# Altium PCB TX_fsi6.PcbDoc
Units mil, origin at the board's own origin, x right, y up, seen from the top; angles counter-clockwise.
Board outline 4470.66 x 2569.09 mil, 2 copper layers (Top Layer, Bottom Layer); 127 components, 96 nets, 409 pads, 170 vias.
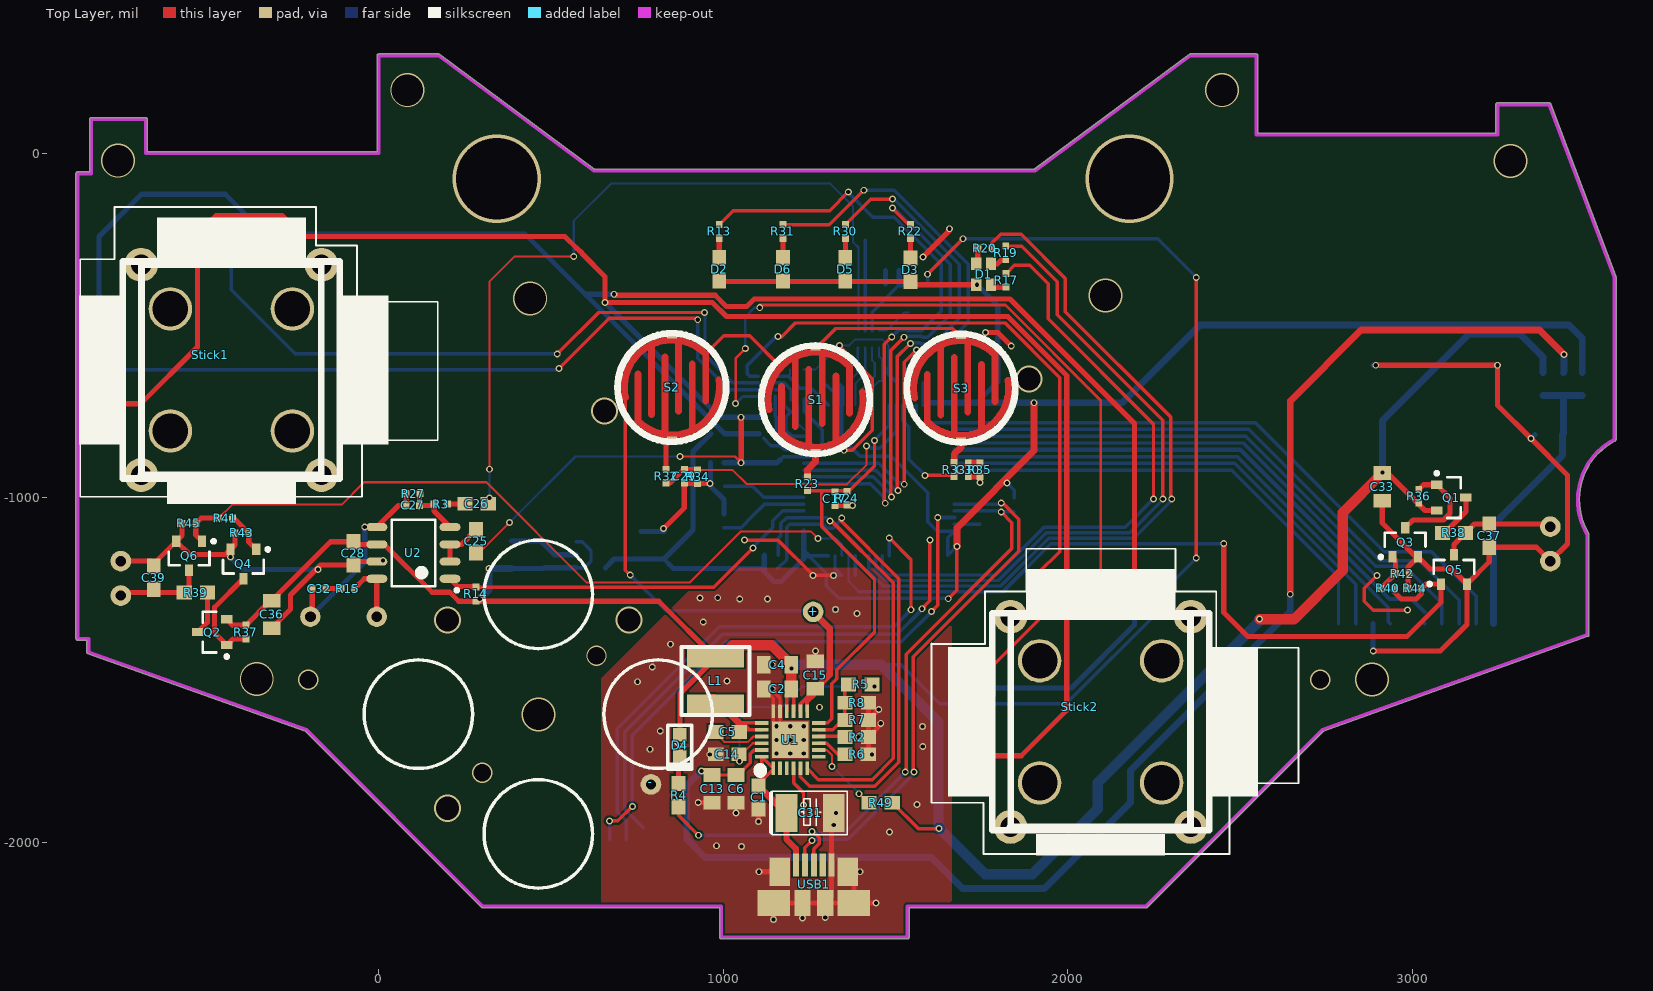
[diagram p0: Top Layer view]
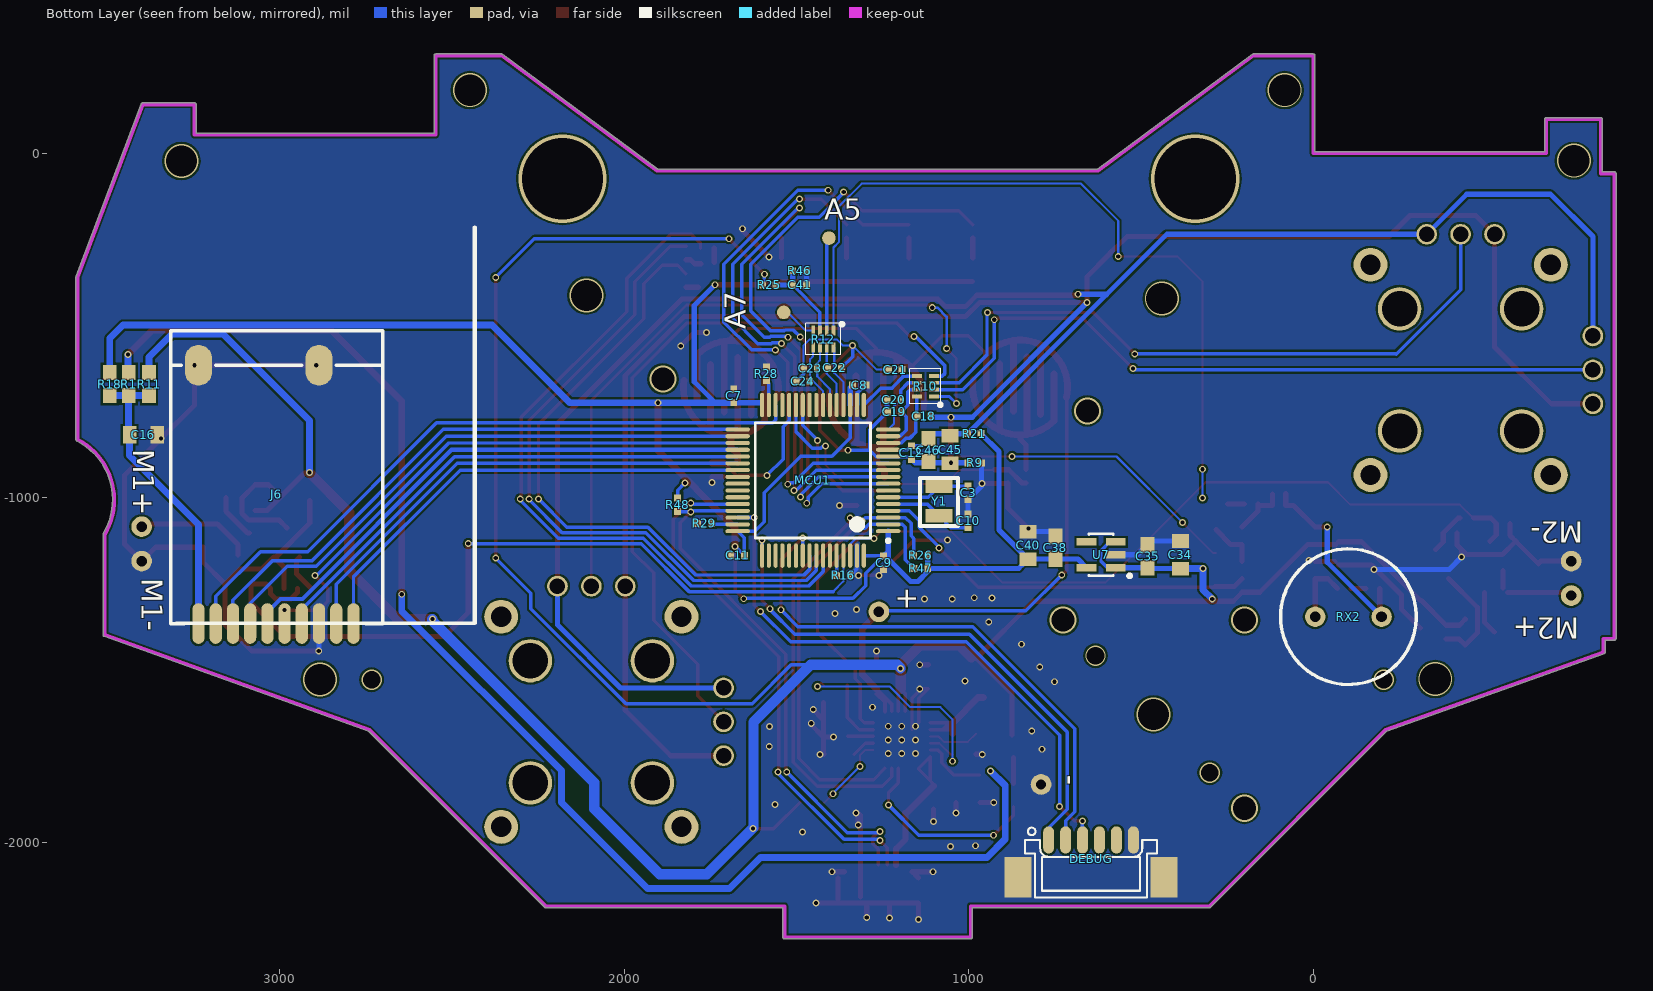
[diagram p1: Bottom Layer view, seen from below]

## Layer stack, top to bottom
Top Solder: solder mask 0.4, Solder Resist, Dk 3.5
Top Layer: signal copper 1.4
Dielectric1: dielectric 12.6, FR-4, Dk 4.8
Bottom Layer: signal copper 1.4
Bottom Solder: solder mask 0.4, Solder Resist, Dk 3.5

## Board outline
989.87,-2275.59 ccw(c994.88,-2275.59) 994.88,-2280.61 1534.25,-2280.61 ccw(c1534.25,-2275.59) 1539.27,-2275.59 1539.27,-2190.06 2227.17,-2190.06 ccw(c2227.17,-2185.04) 2230.73,-2188.57 2230.71,-2188.59 2741.73,-1677.57 3509.56,-1402.36 ccw(c3507.88,-1397.64) 3512.89,-1397.64 3512.89,-1106.3 ccw(c3507.88,-1106.3) 3512.18,-1103.73 cw(c3677.01,-1005.58) 3588.89,-835.18 ccw(c3586.62,-830.71) 3591.63,-830.71 3591.63,-358.27 ccw(c3586.62,-358.27) 3591.3,-356.48 3591.31,-356.49 3591.3,-356.48 3402.34,143.49 3402.33,143.51 3402.34,143.49 ccw(c3397.64,141.73) 3397.64,146.75 3248.03,146.75 ccw(c3248.03,141.73) 3243.02,141.73 3243.02,58.95 2552.26,58.95 2552.26,283.46 ccw(c2547.25,283.46) 2547.25,288.48 2355.91,288.48 ccw(c2355.91,283.46) 2352.91,287.49 2352.92,287.49 2352.91,287.49 1902.68,-46.17 626.46,-46.17 176.22,287.49 176.21,287.49 176.22,287.49 ccw(c173.23,283.46) 173.23,288.48 0,288.48 ccw(c0,283.46) -5.02,283.46 -5.02,5.01 -672.15,5.01 -672.15,98.82 ccw(c-677.17,98.82) -677.17,103.83 -834.65,103.83 ccw(c-834.65,98.82) -839.66,98.82 -839.66,-53.65 -874.02,-53.65 ccw(c-874.02,-58.66) -879.03,-58.66 -879.03,-1408.27 ccw(c-874.02,-1408.27) -874.02,-1413.28 -847.54,-1413.28 -847.54,-1447.64 ccw(c-842.52,-1447.64) -844.2,-1452.36 -844.21,-1452.36 ccw(c-842.52,-1447.64) -844.2,-1452.36 -212.59,-1677.57 298.42,-2188.59 298.41,-2188.57 ccw(c301.97,-2185.04) 301.97,-2190.06 989.87,-2190.06

## Design rules (kind name [scope] priority, off if disabled: settings)
Clearance [All] p1: gap=6
HoleSize [All] p1: absolutevalues=TRUE maxlimit=150 minlimit=1 maxpercent=80.000 minpercent=20.000
MinimumSolderMaskSliver [All] p1 off: minsoldermaskwidth=10
PlaneConnect [All] p1: planeconnectstyle=Direct reliefexpansion=20 reliefentries=4 reliefconductorwidth=10 reliefairgap=10
PolygonConnect [All] p1: connectstyle=Direct reliefconductorwidth=10 reliefentries=4 polygonreliefangle="90 Angle" airgapwidth=10
RoomDefinition BQ24295 [InComponentClass('BQ24295')] p1 off: confinementstyle=ConfineIn formatcopy=TRUE lockcomponents=FALSE outline -1914.72,-3250.59 -606.19,-3250.59 -606.19,-1710.67 -1914.72,-1710.67
RoomDefinition TX_fsi6 [InComponentClass('TX_fsi6')] p2 off: confinementstyle=ConfineIn formatcopy=TRUE lockcomponents=FALSE outline -10235.72,-1425.67 -11720.72,-1425.67 -11720.72,-2570.67 -10235.72,-2570.67
RoutingVias [All] p1: holewidth=28 width=50 viastyle="Through Hole" minholewidth=12 minwidth=20 maxholewidth=28 maxwidth=50
SilkToSilkClearance [All] p1 off: silktosilkclearance=10
SilkToSolderMaskClearance [IsPad] p1 off: minsilkscreentomaskgap=10 clearancetoexposedcopper=TRUE
SolderMaskExpansion [All] p1: expansion=4
UnpouredPolygon [All] p1: allowunpoured=FALSE
Width [All] p1: maxlimit=80 minlimit=6 preferedwidth=10
24 further rules are at their usual default settings.

## Classes and differential pairs
component class TX_fsi6: A5 A7 C3 C7 C8 C9 C10 C11 C12 C16 C17 C18 C19 C20 C21 C22 C23 C24 C25 C26 C27 C28 C29 C30 C32 C33 C34 C35 C36 C37 C38 C39 C40 C41 C45 C46 D1 D2 D3 D5 D6 DEBUG J5 J6 M1+ M1- M2+ M2- MCU1 Q1 Q2 Q3 Q4 Q5 Q6 R1 R3 R9 R10 R11 R12 R13 R14 R15 R16 R17 R18 R19 R20 R21 R22 R23 R24 R25 R26 R27 R28 R29 R30 R31 R32 R33 R34 R35 R36 R37 R38 R39 R40 R41 R42 R43 R44 R45 R46 R47 R48 RX2 S1 S2 S3 Stick1 Stick2 U2 U7 Y1
component class BQ24295: + - C1 C2 C4 C5 C6 C13 C14 C15 C31 D4 L1 R2 R4 R5 R6 R7 R8 R49 U1 USB1

## Components (designator, comment, footprint, x,y, rotation, side; value= is the part's Value field where it differs from the comment)
+ "TP_5" TestPad 1261,-1331 r90 top
- "TP_5" TestPad 790,-1832 r90 top
A5 "" "TestPad - 1mm" 1405.88,-245.96 r180 bottom
A7 "" "TestPad - 1mm" 1536.98,-461.66 r180 bottom
C1 "1uF" 0603 1102.31,-1869.57 r270 top
C2 "22uF" 0805 1157.31,-1554.57 r180 top
C3 "22pF" 0402 1001.84,-984.99 r270 bottom
C4 "22uF" 0805 1157.31,-1484.57 r180 top
C5 "47nF" 0603 1012.31,-1679.57 r0 top
C6 "22uF" 0805 1037.31,-1844.57 r270 top
C7 "1n" 0402 1682.31,-704.09 r270 bottom
C8 "1n" 0402 1317.79,-672.99 r0 bottom
C9 "1n" 0402 1247.31,-1189.09 r90 bottom
C10 "22pF" 0402 1001.84,-1066.69 r90 bottom
C11 "0.1u*4" 0402 1671.13,-1167.08 r180 bottom
C12 "0.1u" 0402 1166.21,-868.85 r90 bottom
C13 "22uF" 0805 967.31,-1844.57 r270 top
C14 "4.7uF" 0603 1012.31,-1744.57 r180 top
C15 "22uF" 0805 1267.31,-1514.57 r90 top
C16 "C" 0805 3395.98,-816.66 r180 bottom
C17 "0.1uF" 0402 1324,-1002 r270 top
C18 "0.1u*4" 0402 1130.78,-762.55 r180 bottom
C19 "1n" 0402 1215.42,-750.74 r0 bottom
C20 "1n" 0402 1217.39,-715.31 r0 bottom
C21 "1n" 0402 1213,-628 r0 bottom
C22 "1n" 0402 1389.64,-622.79 r180 bottom
C23 "1n" 0402 1459.52,-623.77 r0 bottom
C24 "1n" 0402 1481.17,-662.16 r0 bottom
C25 "1uF" 0603 282.59,-1125.59 r270 top
C26 "1uF" 0603 283.57,-1017.32 r0 top
C27 "4.7nF/NC" 0402 98.53,-1022.24 r0 top
C28 "1uF" 0603 -73.71,-1161.02 r270 top
C29 "0.1uF" 0402 886.92,-937.6 r270 top
C30 "0.1uF" 0402 1711.05,-917.82 r270 top
C31 "100uF" 1210 1252,-1914.57 r0 top
C32 "2.2nF" 0402 -173.23,-1263.39 r180 top
C33 "C" 0805 2912.79,-967.91 r270 top
C34 "C" 0805 385.65,-1165.39 r90 bottom
C35 "C" 0603 480.65,-1170.39 r90 bottom
C36 "C" 0805 -311.02,-1338.19 r270 top
C37 "0.1uF" 0603 3223.82,-1109.65 r270 top
C38 "C" 0603 748.13,-1144.84 r90 bottom
C39 "0.1uF" 0603 -653.54,-1231.89 r90 top
C40 "C" 0805 827.85,-1137.95 r90 bottom
C41 "0.1uF" 0402 1490.98,-381.66 r0 bottom
C45 "C" 0805 1054.01,-859.99 r270 bottom
C46 "C" 0603 1117,-860.98 r270 bottom
D1 "LEDx3" LC-0603_Rx2 1756.01,-350.98 r0 top
D2 "LED0" 0603 988.3,-337.2 r90 top
D3 "LED0" 0603 1543.41,-338.19 r90 top
D4 "LED" LED0603 874.04,-1718.7 r270 top
D5 "LED0" 0603 1354.44,-337.2 r90 top
D6 "LED0" 0603 1173.34,-337.2 r90 top
DEBUG "J12" CON1_25-6P-SMD 646,-2087 r180 bottom
J6 "CON12" RF_AS01_SPIPX 3061,-1365 r90 bottom
L1 "2.2uH" L50xx 977.39,-1531.69 r90 top
M1+ "" TestPad 3400.98,-1083.66 r90 bottom
M1- "" TestPad 3400.98,-1183.66 r180 bottom
M2+ "" TestPad -749.02,-1283.66 r270 bottom
M2- "" TestPad -749.02,-1183.66 r270 bottom
MCU1 "STM32F103R8T6" LQFP64_N 1452.31,-949.09 r0 bottom
Q1 "PMOS" SOT-23B_L 3113.58,-999.41 r0 top
Q2 "PMOS" SOT-23B_L -483.75,-1389.93 r180 top
Q3 "NPN" SOT-23B_L 2979.72,-1129.33 r90 top
Q4 "NPN" SOT-23B_L -393.14,-1192.02 r270 top
Q5 "NMOS" SOT-23B_L 3121.46,-1208.07 r90 top
Q6 "NMOS" SOT-23B_L -550.62,-1168.4 r270 top
R1 "NC" 0603 3438.65,-669.95 r90 bottom
R2 "317R" 0603 1387.31,-1694.57 r0 top
R3 "10k" 0402 180.23,-1018.31 r180 top
R4 "1k" 0603 870.11,-1863.38 r90 top
R5 "317R" 0603 1397.98,-1541.66 r180 top
R6 "10k" 0603 1387.31,-1744.57 r180 top
R7 "317R" 0603 1387.31,-1644.57 r0 top
R8 "317R" 0603 1387.31,-1594.57 r0 top
R9 "0R" 0402 983.14,-898.38 r180 bottom
R10 "200R" 0402X4 1125.86,-675.94 r0 bottom
R11 "NC" 0603 3379.59,-669.95 r90 bottom
R12 "200R" 0402X4 1422.12,-539.13 r270 bottom
R13 "1K" 0402 988.3,-226.97 r90 top
R14 "10k" 0402 282,-1279 r270 top
R15 "20R" 0402 -90.55,-1263.39 r0 top
R16 "10k" 0402 1363.73,-1225 r0 bottom
R17 "1k" 0402 1820.97,-368.7 r270 top
R18 "NC" 0603 3493.77,-669.95 r90 bottom
R19 "1k" 0402 1819.99,-288.98 r270 top
R20 "1k" 0402 1758.97,-275.2 r180 top
R21 "FB" 0402 984.12,-813.73 r180 bottom
R22 "1k" 0402 1543.41,-226.97 r90 top
R23 "1k" 0402 1244.2,-959.25 r90 top
R24 "10k" 0402 1359,-1001 r90 top
R25 "4.7k" 0402 1578.98,-381.66 r0 bottom
R26 "4.7k" 0402 1139.98,-1166.66 r180 bottom
R27 "10k" 0402 99.52,-987.79 r180 top
R28 "0R" 0402 1587.47,-639.52 r270 bottom
R29 "FB" 0402 1767.31,-1074.09 r180 bottom
R30 "1k" 0402 1354.44,-226.97 r90 top
R31 "1k" 0402 1173.34,-226.97 r90 top
R32 "1k" 0402 833.77,-937.6 r90 top
R33 "1k" 0402 1670.38,-917.91 r90 top
R34 "10k" 0402 925.3,-938.58 r90 top
R35 "10k" 0402 1745.19,-918.9 r90 top
R36 "1k" 0402 3019.09,-995.47 r90 top
R37 "1k" 0402 -385.83,-1389.37 r270 top
R38 "5R" 0603 3121.46,-1101.77 r180 top
R39 "5R" 0603 -531.5,-1275.2 r0 top
R40 "10k" 0402 2928.54,-1263.19 r0 top
R41 "10k" 0402 -444.88,-1058.66 r180 top
R42 "10k" 0402 2971.85,-1219.88 r180 top
R43 "10k" 0402 -397.64,-1101.97 r0 top
R44 "10k" 0402 3007.28,-1263.19 r0 top
R45 "10k" 0402 -551.18,-1074.41 r0 top
R46 "4.7k" 0402 1490.98,-340.66 r0 bottom
R47 "4.7k" 0402 1138.98,-1204.66 r180 bottom
R48 "NC/1.5k" 0402 1845,-1020 r90 bottom
R49 "10k" 0603 1457,-1885 r180 top
RX2 "NC" sonar-10mm -102.25,-1345.08 r180 bottom
S1 "button" RubberButton-8mm#1 1267.82,-715.16 r90 top
S2 "button" RubberButton-8mm#1 850.77,-679.68 r90 top
S3 "button" RubberButton-8mm#2 1690.32,-681.59 r90 top
Stick1 "stick" stick -428.04,-628.54 r90 top
Stick2 "stick" stick 2095.58,-1650.2 r90 top
U1 "BQ24295" BQ24295 1194.31,-1702.57 r90 top
U2 "LM4871 / FM8002" SOIC8_39MM 100.5,-1160.04 r180 top
U7 "RT9193-33_1_2" SOT23-5 655.65,-1190.39 r90 bottom
USB1 "USB Micro Type B" MOLEX-47346-0001 1263.02,-2176.53 r90 top
Y1 "XTAL" "OSCILLATOR-3.2X2.5 - 2P" 1086,-1012 r270 bottom

## Footprints (in the part's own frame and the unit in brackets; to place one, negate y for a bottom-side part, rotate by r counter-clockwise, add the part's x,y. Pads: shape width x height; smd on the part's side, far side on the other; paste and mask are expansions set on the pad)
0402 [mil] "0402-RES"
  rect 20x20 smd: 1(-19.69,0) 2(20,0)
0402X4 [mm]
  rect 0.75x0.28 smd: 1(-0.625,0.75) 2(-0.625,0.25) 3(-0.625,-0.25) 4(-0.625,-0.75) 5(0.625,-0.75) 6(0.625,-0.25) 7(0.625,0.25) 8(0.625,0.75)
  silkscreen extent -1.22,-1.3 1.15,1.5
0603 [mil] "0603-RES"
  rect 44x40 smd: 1(-33.46,0) 2(34,0)
0805 [mil]
  rect 39.37x50 smd: 1(-40,0) 2(40,0)
  body extent -50,-30 50,30, height 31
1210 [mil] "1210"
  rect 63x110 smd: 1(-68.7,0) 2(68.7,0)
  silkscreen extent -116,-63 108,63
BQ24295 [mm]
  rect 2.7x2.7 smd: 0(0,0)
  rect 1x0.28 smd: 1(-2.1,1.25) 2(-2.1,0.75) 3(-2.1,0.25) 4(-2.1,-0.25) 5(-2.1,-0.75) 6(-2.1,-1.25) 13(2.1,-1.25) 14(2.1,-0.75) 15(2.1,-0.25) 16(2.1,0.25) 17(2.1,0.75) 18(2.1,1.25)
  rect 0.28x1 smd: 7(-1.25,-2.1) 8(-0.75,-2.1) 9(-0.25,-2.1) 10(0.25,-2.1) 11(0.75,-2.1) 12(1.25,-2.1) 19(1.25,2.1) 20(0.75,2.1) 21(0.25,2.1) 22(-0.25,2.1) 23(-0.75,2.1) 24(-1.25,2.1)
  silkscreen extent -2.3,2.2 -2.2,2.2, body extent -2,-2 2,2, height 0.9
CON1_25-6P-SMD [mil]
  oval 31.5x78.7 smd: 1(-122,94) 2(-72.8,94) 3(-23.6,94) 4(25.6,94) 5(74.8,94) 6(124.1,94)
  rect 78.7x118.1 smd: 7(-210.6,-14.3) 8(212.6,-14.3)
  silkscreen extent -191,-73 193,130
L50xx [mm]
  rect 1.4x4.2 smd: 1(1.7,0) 2(-1.7,0)
  silkscreen extent -2.5,-2.5 2.5,2.5
LC-0603_Rx2 [mm]
  rect 0.75x0.93 smd: 1(-0.55,-0.77) 2(0.55,-0.77) 3(0.55,0.77) 4(-0.55,0.77)
LED0603 [mm] "LED0603"
  rect 1x1 smd: 1(-0.787,0) 2(0.787,0)
  silkscreen extent -1.5,-0.89 1.78,0.89
LQFP64_N [mm]
  oval 1.8x0.3 smd: 1(-5.55,3.75) 2(-5.55,3.25) 3(-5.55,2.75) 4(-5.55,2.25) 5(-5.55,1.75) 6(-5.55,1.25) 7(-5.55,0.75) 8(-5.55,0.25) 9(-5.55,-0.25) 10(-5.55,-0.75) 11(-5.55,-1.25) 12(-5.55,-1.75) 13(-5.55,-2.25) 14(-5.55,-2.75) 15(-5.55,-3.25) 16(-5.55,-3.75) 33(5.55,-3.75) 34(5.55,-3.25) 35(5.55,-2.75) 36(5.55,-2.25) 37(5.55,-1.75) 38(5.55,-1.25) 39(5.55,-0.75) 40(5.55,-0.25) 41(5.55,0.25) 42(5.55,0.75) 43(5.55,1.25) 44(5.55,1.75) 45(5.55,2.25) 46(5.55,2.75) 47(5.55,3.25) 48(5.55,3.75)
  oval 0.3x1.8 smd: 17(-3.75,-5.55) 18(-3.25,-5.55) 19(-2.75,-5.55) 20(-2.25,-5.55) 21(-1.75,-5.55) 22(-1.25,-5.55) 23(-0.75,-5.55) 24(-0.25,-5.55) 25(0.25,-5.55) 26(0.75,-5.55) 27(1.25,-5.55) 28(1.75,-5.55) 29(2.25,-5.55) 30(2.75,-5.55) 31(3.25,-5.55) 32(3.75,-5.55) 49(3.75,5.55) 50(3.25,5.55) 51(2.75,5.55) 52(2.25,5.55) 53(1.75,5.55) 54(1.25,5.55) 55(0.75,5.55) 56(0.25,5.55) 57(-0.25,5.55) 58(-0.75,5.55) 59(-1.25,5.55) 60(-1.75,5.55) 61(-2.25,5.55) 62(-2.75,5.55) 63(-3.25,5.55) 64(-3.75,5.55)
  silkscreen extent -5.67,-4.25 4.25,4.57
MOLEX-47346-0001 [mil] "MOLEX-47346-0001"
  rect 67x18 smd: 1(111,52) 2(111,26) 3(111,0) 4(111,-25.59) 5(111,-51.18)
  rect 75x94 smd: 5(0,117) 5(0,-116.14)
  rect 75x47 smd: 5(0,33) 5(0,-32.97)
  rect 83x59 smd: 5(91,-98.43) 5(91,99)
"OSCILLATOR-3.2X2.5 - 2P" [mm] "OSCILLATOR-3.2X2.5"
  rect 1x2 smd: 1(-1.143,0) 2(1.016,0)
  silkscreen extent -1.78,-1.4 1.78,1.4
RF_AS01_SPIPX [mm]
  oval 3x0.9 smd: 1(0,4.445) 2(0,3.175) 3(0,1.905) 4(0,0.635) 5(0,-0.635) 6(0,-1.905) 7(0,-3.175) 8(0,-4.445) 9(0,-5.715) 10(0,-6.985)
  oval 3x2 smd: 11(19.05,4.445) 12(19.05,-4.445)
  silkscreen extent 0,-9.14 21.59,6.5
RubberButton-8mm#1 [mm]
  rect 0.25x0.75 smd: 1(-3.75,0) 2(3.75,0)
  Top Layer lines w0.5: -0.733,3.422 cw(c0,0) 2.475,-2.475 ; -2.475,2.5 1,2.5 ; -2.475,2.475 ccw(c0,0) 0.575,-3.452 ; -2,1.5 3,1.5 ; -3.25,0.5 2.25,0.5 ; -1.75,-0.5 3.25,-0.5 ; -3,-1.5 1.75,-1.5 ; -1,-2.5 2.475,-2.5
  silkscreen extent -4,-4 4,4
RubberButton-8mm#2 [mm]
  rect 0.25x0.75 smd: 1(-3.75,0) 2(3.75,0)
  Top Layer lines w0.5: -0.733,3.422 cw(c0,0) 2.068,2.823 cw(c0,0) 2.475,-2.475 ; -2.475,2.5 1,2.5 ; -2.475,2.475 ccw(c0,0) 0.575,-3.452 ; -2,1.5 3,1.5 ; -3.25,0.5 2.25,0.5 ; -1.75,-0.5 3.25,-0.5 ; -3,-1.5 1.75,-1.5 ; -1,-2.5 2.475,-2.5
  silkscreen extent -4,-4 4,4
SOIC8_39MM [mm]
  oval 1.55x0.6 smd: 1(-2.7,1.905) 2(-2.7,0.635) 3(-2.7,-0.635) 4(-2.7,-1.905) 5(2.7,-1.905) 6(2.7,-0.635) 7(2.7,0.635) 8(2.7,1.905)
  silkscreen extent -3.33,-2.45 1.6,2.87
sonar-10mm [mm]
  round 1.5 hole 0.8: 1(-2.45,0) 2(2.45,0)
  silkscreen extent -5,-5 5,5
SOT23-5 [mm]
  rect 0.55x1.45 smd: 1(-0.315,-2.091) 2(0.635,-2.091) 3(1.585,-2.091) 4(1.585,0.059) 5(-0.315,0.059)
  silkscreen extent -1.04,-3.24 2.19,-0.12
SOT-23B_L [mm] "SOT23, 3-Leads, Body 2.9x1.3mm, Pitch 0.95mm, Lead Span 2.4mm, IPC High Density"
  rect 0.85x0.6 smd: 1(-1.075,0.95) 2(-1.075,-0.95) 3(1.075,0)
  silkscreen extent -1.2,-1.5 0.7,1.92, body extent -0.7,-1.5 0.7,1.5, height 1.14
stick [mm]
  round 2.5 hole 1.5: 0(-7.75,-6.65) 0(-7.75,6.65) 0(7.75,-6.65) 0(7.75,6.65)
  round 3.2 hole 2.6: 0(-4.5,-4.5) 0(-4.5,4.5) 0(4.5,-4.5) 0(4.5,4.5)
  round 1.524 hole 1.143: 1(10,-2.5) 2(10,0) 3(10,2.5) 4(2.5,9.75) 5(0,9.75) 6(-2.5,9.75)
  silkscreen extent -9.87,-11.6 11.25,11.25
TestPad [mil]
  round 60 hole 30: 1(0,0)
"TestPad - 1mm" [mm]
  round 1 smd: 1(0,0)

## Part data
A5 A7 M1+ M1- M2+ M2-: library part TP_5
C1 C2 C4 C5 C6 C13 C14 C15: library part C
C3 C7 C8 C9 C10 C11 C12 C18 C19 C20 C21 C22 C23 C24 C25 C26 C27 C28 C32 C37 C39 C41: library part CAP0402-CAP, "<b>Capacitor</b> / Standard 0603 ceramic capacitor, and 0.1\" leaded capacitor."
C17 C29 C30: library part Cap, "Capacitor"
C31: library part "Cap Pol1", "Polarized Capacitor (Radial)"
D1: "Typical RED GaAs LED"
D2 D3 D5 D6: "Typical INFRARED GaAs LED"
J6: "Connector"
L1: library part INDUCTOR
MCU1: "STM32 ARM-based 32-bit MCU with 64 Kbytes Flash, 64-pin LQFP, Industrial Temperature"
Q3 Q4: "NPN Bipolar Transistor"
R1 R11 R18: library part Res
R2 R4 R5 R6 R7 R8 R49: library part R
R3 R9 R13 R14 R15 R16 R17 R19 R20 R21 R22 R23 R24 R25 R26 R27 R28 R29 R30 R31 R32 R33 R34 R35 R36 R37 R38 R39 R40 R41 R42 R43 R44 R45 R46 R47 R48: library part Res2, "Resistor"
R10 R12: library part Res*4, "Resistor"
RX2: library part sonar
U2: library part LM4871
USB1: library part USB_Micro_TypeB, "Connector SMD USB Micro Type B middle mount"
Y1: "Crystal Oscillator"

## Via types
v1: diameter 20, hole 12, Top Layer to Bottom Layer, 141 vias
v2: diameter 98.43, hole 90.55, Top Layer to Bottom Layer, 9 vias
v3: diameter 20/20 (per signal layer), hole 12, Top Layer to Bottom Layer, 9 vias
v4: diameter 78.74, hole 66.93, Top Layer to Bottom Layer, 5 vias
v5: diameter 59.06, hole 51.18, Top Layer to Bottom Layer, 4 vias
v6: diameter 255.91, hole 236.22, Top Layer to Bottom Layer, 2 vias

## Nets (pads, with @x,y where several pads share a name; then routed paths per layer and width w, separated by ;. In a path a pad name is that pad's centre, name@x,y a point inside that pad or via, vN(x,y) a via of type N, cw(c..) or ccw(c..) an arc to the next point about the centre after c; other vN are vias at no path point)
ADC1: R10.1 Stick2.2 | length 2033.6
  Top Layer w8: v1(1036,-726) 1036,-595 v1(1064,-567) ; v1@1106,-440 1819,-440 2095.58,-716.58 Stick2.2
  Bottom Layer w8: v1(1036,-726) 1056.53,-705.47 R10.1 ; v1(1064,-567) 1064,-475 1091,-448 v1(1106,-448)
ADC2: R10.2 Stick1.5 | length 2127.2
  Top Layer w10: v1(523,-625) 669,-479 926,-479 v1(926,-483)
  Bottom Layer w10: Stick1.5 v1@523,-628.54 ; v1(926,-483) 926,-595 1016.78,-685.78 R10.2
ADC3: R10.3 Stick1.2 | length 1974
  Top Layer w10: v1(518,-582) 638,-462 v1(946,-462)
  Bottom Layer w10: Stick1.2 -428.04,-395.96 -241,-583 -240,-582 v1(518,-582) ; v1(946,-462) 947,-463 947,-585 1028.1,-666.1 R10.3
ADC4: R10.4 Stick2.5 | length 2192.1
  Top Layer w10: v1(1159,-532) 1169.82,-532 1209.32,-492.5 1818.34,-492.5 1977,-651.16 1977,-1156 1915,-1218 1915,-1355 1787,-1483 1787,-1574.92 Stick2.5
  Bottom Layer w10: R10.4 1076.41,-646.41 1069,-639 1069,-616 1153,-532 v1(1159,-532)
ADC5: A5.1 R12.2 | length 262.2
  Bottom Layer w10: R12.2 A5.1@1412.27,-252.35
ADC6: C41.2 R12.3 R25.1 R46.2 | length 252.6
  Bottom Layer w10: R12.3 1431.96,-460.69 C41.2
  Bottom Layer w15: C41.2 R25.1 ; C41.2@1510.98,-379.36 R46.2
ADC7: A7.1 R12.4 | length 107.2
  Bottom Layer w6: R12.4 1473.12,-514.52 1525.98,-461.66 A7.1
AGND: C12.1 C18.2 C19.2 C20.2 C21.2 C22.2 C23.2 C24.2 C25.2 C45.2 C46.2 MCU1.12 R9.1 Stick1.3 Stick1.6 Stick2.3 Stick2.6 | length 7801.3
  Top Layer w6: C25.2 291.41,-1159.59 v1(379,-1072) ; v1(874,-880) 1034.01,-880 v1(1052,-897.99)
  Top Layer w10: v1(1337,-558) 1433,-654 1433,-804 1408.31,-828.69 1407.3,-828.69 1395,-840.99 1395,-842 1375,-862 v1(1350,-862)
  Top Layer w15: Stick1.6 -691.32,-726.97 -526.47,-562.11 Stick1.3 -471.63,-180 -281,-180 -220,-241 540,-241 574.5,-275.5 575.73,-275.5 589.5,-289.27 589.5,-290.5 657,-358 v1(657,-433) 968,-433 1009,-474 1826,-474 1997.15,-645.15 Stick2.3 1997.15,-1616.49 1865.02,-1748.62 Stick2.6 ; v1(1052,-897.99) v1(1052,-766)
  Bottom Layer w6: v1(379,-1072) 571,-880 v1(874,-880) ; C21.2 1267,-628 v1(1337,-558) 1337.48,-557.52 1365.8,-557.52 1383.35,-539.97 1461.97,-539.97 1479.52,-557.52 C23.2
  Bottom Layer w10: C12.1 1174.56,-880.19 MCU1.12 1268.81,-880.19 1287,-862 ; C19.2 1236.54,-750.74 1280.24,-794.45 1280.24,-795.56 1287,-802.32 1287,-862 ; v1(1337,-558) 1337,-590.15 C22.2 ; v1(1350,-862) 1287,-862 ; C23.2 1479.52,-640.51 C24.2
  Bottom Layer w15: v1(657,-433) 990,-766 v1(1052,-766) 1107.33,-766 C18.2 ; R9.1 C45.2@1052.39,-898.38 ; v1(1052,-897.99) C45.2@1052.39,-898.38 ; C45.2 C45.2@1052.39,-898.38 ; C12.1 1156.37,-898.38 C45.2@1052.39,-898.38 ; C19.2@1237.39,-748.77 C20.2
BEEP_EN: MCU1.4 R14.1 U2.1 | length 1144.1
  Top Layer w10: R14.1 597.52,-1259.32 598.2,-1260 961.8,-1260 962.48,-1259.32 972.68,-1259.32 v1(1086,-1146)
  Top Layer w15: U2.1 229.24,-1257.48 R14.1@284.56,-1257.48
  Bottom Layer w10: v1(1086,-1146) 1086,-1144 1144,-1086 1144,-1066 1172.33,-1037.67 MCU1.4
CE: J6.2 MCU1.30 | length 1959.7
  Bottom Layer w10: MCU1.30 1560.58,-773.58 1569,-782 2545,-782 2919,-1156 3056,-1156 3186,-1286 J6.2
CSN: J6.3 MCU1.33 | length 1738.4
  Bottom Layer w10: MCU1.33 2525.48,-801.45 2906.03,-1182 3021,-1182 3136,-1297 J6.3
DAC: C26.2 R12.1 | length 2256.7
  Top Layer w6: v1(321,-917) 321,-373 395,-299 v1(566,-299)
  Bottom Layer w6: v1(321,-1001) v1(321,-917) ; v1(566,-299) 566,-196 674,-88 1311,-88 1377.19,-154.19 1377.19,-257.84 1392.59,-273.23 R12.1
GND: -.1 C1.2 C2.2 C3.2 C4.2 C6.2 C7.1 C8.1 C9.1 C10.2 C11.1 C13.2 C14.2 C15.2 C16.2 C17.2 C28.2 C29.2 C30.2 C31.2 C33.2 C34.2 C35.2 C36.2 C37.2 C38.2 C39.2 C40.2 C41.1 DEBUG.6 DEBUG.7 DEBUG.8 J6.8 J6.11 J6.12 M1-.1 M2-.1 MCU1.18 MCU1.63 Q3.2 Q4.2 Q5.2 Q6.2 R2.2 R6.1 R7.2 R8.2 R9.2 R16.1 R24.1 R28.1 R29.1 R34.1 R35.1 R42.1 R43.1 R44.1 R45.1 R46.1 U1.0 U1.17 U1.18 U2.7 U7.2 USB1.5 | length 6659.7
  Top Layer w10: v1(1062,-1122) 1063,-1123 1159,-1123 v1(1261,-1225) v1(1320,-1225) ; U1.0@1145.1,-1653.35 U1.18 1145.1,-1582.35 C2.2 1137.31,-1554.57 1164.78,-1582.03 U1.17 U1.0@1164.78,-1673.03
  Top Layer w15: M2-.1 -661.49,-1183.66 -653.54,-1191.6 Q6.2 ; R45.1 -570.87,-1108.93 Q6.2 ; v1(-430.54,-1172.14) Q4.2 ; R43.1 -417.32,-1136.48 Q4.2 ; C36.2 -256.02,-1323.18 -256.02,-1281.66 -169.38,-1195.02 C28.2 ; C28.2@-63.73,-1185.04 U2.7 ; v1(827,-1089) 886.92,-1029.08 C29.2 ; C29.2@887.59,-958.27 R34.1 v1(961.73,-958.27) ; v1(927.31,-1884.57) C13.2 ; v1(960.89,-1744.57) C14.2 ; v1(1037.31,-1914.57) C6.2 ; v1(1102.31,-1939.57) C1.2 ; v1(1104.02,-2085.53) 1164.02,-2085.53 USB1.5@1146.02,-2103.53 ; C4.2 v1(1142.31,-1484.57) ; v1@1137.31,-1554.57 v1(1142.31,-1554.57) ; v1(1146.02,-2224.53) 1146.02,-2176.53 USB1.5@1230.02,-2176.53 ; v1(1230.02,-2219.53) USB1.5@1230.02,-2176.53 ; C15.2 v1(1267.31,-1444.57) ; v1(1295.99,-2218.56) USB1.5@1295.99,-2176.53 ; USB1.5@1314.2,-2158.32 1314.2,-2065.53 C31.2@1314.2,-1921.06 ; v1(1320.7,-1949.38) C31.2 v1(1326.89,-1914.57) ; C17.2 v1(1375,-1022) ; USB1.5@1361.45,-2085.53 v1(1397.02,-2085.53) ; USB1.5@1379.16,-2103.25 USB1.5@1379.16,-2176.53 ; v1(1392.31,-1694.57) R2.2 ; R6.1 v1(1431.89,-1744.57) ; R6.1@1421.31,-1744.03 R2.2 ; R8.2 R7.2 ; v1(1443.02,-2176.53) USB1.5@1379.16,-2176.53 ; v1(1451.31,-1614.57) R7.2 ; v1(1457.31,-1654.57) 1458.31,-1654.57 1459.81,-1656.07 R2.2 ; v1(1580,-301) 1657,-224 v1(1657,-219) ; C30.2@1711.81,-938.58 R35.1 v1(1745.19,-955.19) ; v1(1761,-520) 1797,-520 v1(1836,-559) ; v1(2887,-1445) 3081.55,-1445 3158.86,-1367.7 Q5.2 ; v1(2894,-615) v1(3248,-615) 3248,-731.35 v1(3344.65,-828) 3451,-934.35 3451,-1133.65 M1-.1 3360.97,-1143.65 C37.2 3223.82,-1185.43 Q5.2 ; C33.2 2912.79,-1073.47 Q3.2@3010.98,-1171.65 ; R44.1 2987.6,-1201.18 Q3.2 3052.13,-1206.66 3115.13,-1206.66 Q5.2 ; Q6.2 -549.44,-1164.66 -445.5,-1164.66 Q4.2 ; USB1.5@1230.02,-2176.53 USB1.5@1295.99,-2176.53 ; USB1.5@1295.99,-2176.53 USB1.5@1379.16,-2176.53 ; R2.2 R7.2
  Bottom Layer w10: C8.1 1300.51,-672.99 1321.58,-694.06 1321.58,-727.81 MCU1.18 ; v1(1320,-1225) R16.1 1324.36,-1205.31 MCU1.63
  Bottom Layer w15: v1(-430.54,-1172.14) -395.02,-1207.66 v1(-176.02,-1207.66) ; C34.2 469.65,-1125.39 C35.2 509.65,-1165.39 U7.2 ; C38.2@761.02,-1097.95 C40.2 ; R9.2 963.14,-966.29 C3.2 C10.2 ; v1(1457.31,-1654.57) v1@1459.81,-1652.07 ; C41.1@1471.3,-379.36 R46.1 ; v1@1578,-303 1578,-301 v1(1580,-301) ; J6.8 2886,-1445 v1(2887,-1445) ; J6.12 v1(2894,-615) ; J6.11 v1(3248,-615) ; v1(3344.65,-828) C16.2
  other v1: 1053,-2012 980,-2010 1483,-1970 1562,-1890 787,-1730 1579,-1722 817,-1677 1578,-1664 1279,-1608 751,-1534 1011,-1532 794,-1491 847,-1425 942,-1360 1388,-1336 1326,-1324 1048,-1294 1128,-1294 932,-1291 984,-1290 11.98,-1181.66
  other v3: 1154.94,-1741.94 1194.31,-1741.94 1233.68,-1741.94 1154.94,-1702.57 1194.31,-1702.57 1233.68,-1702.57 1154.94,-1663.2 1194.31,-1663.2 1233.68,-1663.2
IRQ: J6.7 MCU1.37 | length 1490.4
  Bottom Layer w10: MCU1.37 2492.87,-880.19 2931,-1318.32 2931,-1360 J6.7
KEY1: C17.1 MCU1.26 R23.1 R24.2 U1.12 | length 1238.3
  Top Layer w10: R23.1 C17.1@1320.34,-978.94 ; U1.12 1303.53,-1653.35 1314.98,-1641.89 1314.98,-1539.66 1329.98,-1524.66 1329.98,-1498.66 1439,-1389.65 1439,-1236 1286.21,-1083.21 1286.21,-980.12 ; C17.1@1321.21,-979.8 1366.2,-979.8 1438,-908 1439,-907 v1(1439,-834)
  Bottom Layer w10: v1(1439,-834) 1438,-833 1481.84,-789.16 MCU1.26
KEY2: C29.1 MCU1.27 R32.1 R34.2 | length 879.5
  Top Layer w6: R34.2 1026.58,-918.58 1067.94,-959.94 1258.13,-959.94 1258.99,-960.8 1334.94,-960.8 1335.14,-961 1359,-961 1416,-904 v1(1416,-849.69)
  Top Layer w15: R32.1 845.36,-957.28 884.06,-918.58 R34.2
  Bottom Layer w10: v1(1416,-849.69) 1422.99,-849.69 1429.3,-856 1454,-856 1501.53,-808.47 MCU1.27
KEY3: C30.1 MCU1.28 R33.1 R35.2 | length 404.4
  Top Layer w10: v1(1586,-935) R33.1@1667.79,-935 ; R33.1 1671.58,-937.6 C30.1
  Top Layer w19.68: C30.1@1711.81,-898.9 R35.2
  Bottom Layer w10: MCU1.28@1522.17,-730.59 MCU1.28 1521.21,-775.51 1539,-793.3 1539,-888 v1(1586,-935)
MISO: J6.6 MCU1.35 | length 1623.7
  Top Layer w10: v1(2898,-1225) 2861,-1262 2861,-1300 2887,-1326 v1(2986,-1326)
  Bottom Layer w10: MCU1.35 2509.18,-840.82 2895.68,-1227.32 2897.68,-1229.32 2893.88,-1229.32 2893.88,-1229.12 v1(2898,-1225)
MOSI: J6.5 MCU1.36 | length 1568.8
  Bottom Layer w12: MCU1.36 2501.02,-860.51 2934.46,-1293.95 2998.31,-1293.95 J6.5@3036,-1331.64 ; J6.5@3030,-1359 J6.5
NetC3_1: C3.1 MCU1.6 Y1.1 | length 243.2
  Bottom Layer w10: C3.1@1003.53,-967 Y1.1 1117.3,-998.3 MCU1.6
NetC5_1: C5.1 U1.21 | length 149.3
  Top Layer w6: C5.1@978.85,-1684.57 1002.85,-1708.57 1072.04,-1708.57 1087.88,-1692.73 U1.21
NetC5_2: C5.2 L1.2 U1.19 U1.20 | length 324.5
  Top Layer w10: 1046.31,-1653.57 C5.2@1065.79,-1673.04 ; 1046.52,-1653.36 U1.19 ; C5.2@1057.84,-1673.04 C5.2@1065.79,-1673.04 ; 1057.84,-1653.57 1077.31,-1673.04 ; U1.20 1077.31,-1673.04 ; C5.2@1065.79,-1673.04 1077.31,-1673.04
  Top Layer w20: L1.2@957.31,-1579.96 972.7,-1579.96 1046.31,-1653.57 C5.2@1046.31,-1684.57
NetC10_1: C10.1 MCU1.5 Y1.2 | length 260.3
  Bottom Layer w10: C10.1 1051.63,-1086.37 Y1.2 1120.01,-1017.99 MCU1.5
NetC16_1: C16.1 J6.1 R1.1 R11.1 R18.1 | length 855.9
  Bottom Layer w20: J6.1 3236,-1077 3435.98,-877.02 C16.1 ; R11.1 R1.1 ; C16.1@3438.65,-814 R1.1 ; R18.1 R1.1
NetC18_1: C18.1 MCU1.14 R10.8 | length 193.4
  Bottom Layer w10: C18.1 R10.8 ; C18.1@1153.98,-766.07 1153.98,-809.66 1171.98,-827.66 1182.98,-827.66 1196.14,-840.82 MCU1.14
NetC19_1: C19.1 MCU1.15 R10.7 | length 212.9
  Bottom Layer w10: R10.7 1170.1,-685.78 1176.71,-692.38 1176.71,-731.71 C19.1 1181.98,-764.5 1181.98,-803.66 1199.46,-821.14 MCU1.15
NetC20_1: C20.1 MCU1.16 R10.6 | length 185.1
  Bottom Layer w6: C20.1 1216.42,-734.03 1216.42,-784.07 MCU1.16
  Bottom Layer w10: R10.6 1176.42,-666.1 1197.71,-687.38 C20.1
NetC21_1: C21.1 MCU1.17 R10.5 | length 209.1
  Bottom Layer w6: 1188.05,-646.41 1193.31,-641.15 C21.1
  Bottom Layer w10: R10.5 1188.05,-646.41 1221.98,-680.35 ; 1221.98,-681.84 1255.94,-681.84 MCU1.17
NetC22_1: C22.1 MCU1.21 R12.7 | length 178.8
  Bottom Layer w6: MCU1.21 1383.42,-668.38 1412.27,-639.52 R12.7
NetC23_1: C23.1 MCU1.22 R12.6 | length 185.3
  Bottom Layer w6: MCU1.22 1403.1,-684.13 1439.83,-647.4 C23.1 1439.83,-609.01 1431.96,-601.14 R12.6
NetC24_1: C24.1 MCU1.23 R12.5 | length 191.4
  Bottom Layer w6: MCU1.23 1422.79,-690.03 1451.63,-661.19 1460.52,-661.19 1460.52,-597.21 1451.64,-588.34 R12.5
NetC25_1: C25.1 U2.2 U2.3 | length 143.6
  Top Layer w15: U2.2 U2.3 239.67,-1135.04 C25.1
NetC26_1: C26.1 R3.1 | length 49.2
  Top Layer w15: R3.1 C26.1@249.12,-1018.31
NetC27_1: C27.1 C32.2 R27.2 RX2.2 U2.5 | length 581
  Top Layer w15: RX2.2@-193.23,-1339.59 C32.2 ; v1(-40.64,-1085.04) U2.5 57,-1022.24 C27.1 ; C27.1@79.52,-1021.57 R27.2
  Bottom Layer w15: RX2.2 -40.64,-1187.01 v1(-40.64,-1085.04)
NetC27_2: C27.2 R3.2 R27.1 U2.4 | length 163.1
  Top Layer w15: R27.1@118.53,-988.46 C27.2 156.29,-1022.24 R3.2 160.23,-1038.46 U2.4
NetC32_1: C32.1 R15.1 | length 43.3
  Top Layer w15: C32.1 R15.1
NetC37_1: C37.1 M1+.1 Q5.3 R38.1 | length 327
  Top Layer w15: Q5.3 3121.46,-1135.24 R38.1 3180.51,-1076.18 C37.1 M1+.1@3393.5,-1076.18
NetC39_1: C39.1 M2+.1 Q6.3 R39.1 | length 225.7
  Top Layer w15: M2+.1@-740.55,-1275.2 R39.1 ; R39.1@-550.62,-1260.85 Q6.3
NetD1_2: D1.2 R17.2 | length 35.9
  Top Layer w15: D1.2@1785.07,-388.7 R17.2
NetD1_3: D1.3 R19.2 | length 47.2
  Top Layer w15: D1.3 1795.98,-320.67 1807.67,-308.98 R19.2
NetD1_4: D1.4 R20.2 | length 40.9
  Top Layer w15: D1.4@1738.97,-316.06 R20.2
NetD2_2: D2.2 R13.1 | length 56.6
  Top Layer w15: D2.2 R13.1
NetD3_2: D3.2 R22.1 | length 57.5
  Top Layer w15: D3.2 R22.1
NetD4_2: D4.2 R4.2 | length 75.7
  Top Layer w15: R4.2 D4.2@870.11,-1753.64
NetD5_2: D5.2 R30.1 | length 56.6
  Top Layer w15: D5.2 R30.1
NetD6_2: D6.2 R31.1 | length 56.6
  Top Layer w15: D6.2 R31.1
NetMCU1_8: MCU1.8 R13.2 | length 1846.5
  Top Layer w10: R13.2 1029.26,-166 1309,-166 v1(1363,-112) ; v1(1470.3,-1015.7) 1467.69,-1013.08 1467.69,-554 v1(1489,-532.69)
  Bottom Layer w10: MCU1.8 1426.93,-958.93 1466,-998 1466,-1011.4 v1(1470.3,-1015.7) ; v1(1363,-112) 1362,-113 1434,-185 1496,-185 1633,-322 1633,-457.69 1575.58,-515.12 1535.81,-515.12 1533.43,-512.73 1508.96,-512.73 v1(1489,-532.69)
NetMCU1_9: MCU1.9 R22.2 | length 1375.5
  Top Layer w10: v1(1488.69,-997.31) 1486.07,-994.7 1486.07,-572.39 v1(1524.73,-533.73) ; v1(1491,-159) R22.2@1538.97,-206.97
  Bottom Layer w10: MCU1.9 1435.09,-939.25 1488.69,-992.85 v1(1488.69,-997.31) ; v1(1491,-159) 1496,-159 1659,-322 1659,-468.46 1593.73,-533.73 1577.06,-533.73 1574.44,-531.12 1527.35,-531.12 v1(1524.73,-533.73)
NetMCU1_10: MCU1.10 R30.2 | length 1512.7
  Top Layer w10: R30.2 1428.41,-133 v1(1491,-133) ; v1(1507.07,-978.93) 1504.46,-976.31 1504.46,-590.77 v1(1543.12,-552.12)
  Bottom Layer w10: MCU1.10 1443.24,-919.56 1502.61,-978.93 v1(1507.07,-978.93) ; v1(1491,-133) 1496,-133 1685,-322 1685,-479.23 1612.12,-552.12 1572.81,-552.12 1570.2,-549.5 1545.73,-549.5 v1(1543.12,-552.12)
NetMCU1_11: MCU1.11 R31.2 | length 1740.7
  Top Layer w10: R31.2 1308.03,-206.97 v1(1408,-107) ; v1(1525.46,-960.54) 1525.46,-606.54 v1(1561.5,-570.5)
  Bottom Layer w10: MCU1.11 1451.39,-899.88 1507.76,-956.24 1521.15,-956.24 v1(1525.46,-960.54) ; v1(1408,-107) 1496,-107 1711,-322 1711,-490 1630.5,-570.5 v1(1561.5,-570.5)
NetMCU1_20: MCU1.20 R12.8 | length 180.1
  Bottom Layer w6: MCU1.20 1363.73,-663.46 1390.32,-636.87 1390.32,-563.73 R12.8
NetMCU1_31: MCU1.31 R28.2 | length 74
  Bottom Layer w10: MCU1.31 1580.27,-666.73 R28.2
NetMCU1_44: MCU1.44 USB1.2 | length 1530.2
  Top Layer w10: USB1.2 1237.02,-2015.82 v1(1258,-1994.84) ; v1(1554.16,-1796) 1551,-1792.84 1551,-1461.84 1857.68,-1155.15 1857.68,-1061.82 1810.7,-1014.83 v1(1807,-1014.83)
  Bottom Layer w10: v1(1258,-1994.84) 1261.16,-1991.68 1362.17,-1991.68 1554.16,-1799.7 v1(1554.16,-1796) ; MCU1.44 1803.84,-1017.99 v1(1807,-1014.83)
NetMCU1_45: MCU1.45 R48.1 USB1.3 | length 1529.2
  Top Layer w10: v1(1258,-1968.84) 1261.7,-1968.84 1279,-1986.14 1279,-2003.54 1263.02,-2019.52 USB1.3 ; v1(1528.16,-1796) 1531.31,-1792.84 1531.31,-1453.68 1838,-1147 1838,-1071.83 v1(1807,-1040.83)
  Bottom Layer w10: v1(1258,-1968.84) 1261.16,-1972 1352.16,-1972 v1(1528.16,-1796) ; MCU1.45 1803.84,-1037.67 v1(1807,-1040.83) R48.1@1843.86,-1040.83
NetMCU1_47: MCU1.47 R29.2 | length 73.5
  Bottom Layer w10: MCU1.47 R29.2@1744.36,-1077.04
NetMCU1_56: MCU1.56 R17.1 | length 1831.1
  Top Layer w10: R17.1 1844.99,-325 1890,-325 1943,-378 1943,-480.18 2249,-786.18 v1(2249,-1003)
  Bottom Layer w10: MCU1.56 1462.16,-1208.03 1478.13,-1224 1792.12,-1224 1931.12,-1085 2167,-1085 v1(2249,-1003)
NetMCU1_57: MCU1.57 R19.1 | length 1938.4
  Top Layer w10: R19.1 1866.29,-269.29 1970,-373 1970,-469 2276,-775 v1(2276,-1003)
  Bottom Layer w10: MCU1.57 1442.47,-1210.97 1471.5,-1240 1798.75,-1240 1937.75,-1101 2180.7,-1101 2276,-1005.7 v1(2276,-1003)
NetMCU1_58: MCU1.58 R20.1 | length 2110
  Top Layer w10: R20.1 1778.65,-261.35 1805,-235 1865,-235 1993.33,-363.33 1993.33,-459.33 2299.33,-765.33 2299.33,-1000.33 v1(2302,-1003)
  Bottom Layer w10: MCU1.58 1422.79,-1213.91 1464.88,-1256 1805.37,-1256 1944.37,-1117 2191.7,-1117 2302,-1006.7 v1(2302,-1003)
NetMCU1_60: MCU1.60 R16.2 | length 57.5
  Bottom Layer w10: MCU1.60 1383.42,-1224.69 R16.2
NetQ1_D: Q1.3 R38.2 | length 134.4
  Top Layer w15: R38.2 3093.83,-1101.77 3155.91,-1039.69 Q1.3
NetQ1_G: Q1.1 Q3.3 R36.2 | length 304.9
  Top Layer w15: Q3.3 3002.07,-1064.66 3091.04,-1064.66 3109.98,-1045.72 3109.98,-1000.73 Q1.1 3032.56,-962.01 R36.2
NetQ2_D: Q2.3 R39.2 | length 126.6
  Top Layer w15: Q2.3 -497.5,-1361.36 R39.2
NetQ2_G: Q2.1 Q4.3 R37.2 | length 305.1
  Top Layer w15: Q4.3 -476.5,-1317.7 -476.5,-1392.27 Q2.1 -423.46,-1409.37 R37.2
NetQ3_1: Q3.1 R40.1 R42.2 | length 113.3
  Top Layer w15: R40.1 2951.85,-1220.2 R42.2 2951.85,-1181.18 Q3.1
NetQ4_1: Q4.1 R41.1 R43.2 | length 122.3
  Top Layer w15: R41.1 -420.95,-1058.66 R43.2 -377.64,-1127.8 Q4.1
NetR2_1: R2.1 U1.10 | length 75
  Top Layer w10: U1.10 R2.1@1352,-1692.72
NetR4_1: R4.1 U1.4 | length 566.6
  Top Layer w10: R4.1 870.11,-1921.79 v1(927.98,-1979.66) ; U1.4 1204.16,-1827.84 1232.98,-1856.66 v1(1232.98,-1891.66)
  Bottom Layer w10: v1(927.98,-1979.66) 1144.98,-1979.66 v1(1232.98,-1891.66)
NetR5_2: R5.2 R7.1 R8.1 U1.11 | length 184
  Top Layer w10: U1.11 1317.82,-1673.03 1353.31,-1637.55 R5.2@1353.31,-1544.57
NetR6_2: R6.2 U1.9 | length 68.6
  Top Layer w10: U1.9 1300.15,-1712.4 R6.2@1332.31,-1744.57
NetR15_2: R15.2 RX2.1 U2.8 | length 186.5
  Top Layer w15: R15.2 -42.2,-1235.04 U2.8 RX2.1
NetR23_2: R23.2 S1.1 | length 86.2
  Top Layer w19.68: R23.2 1244.2,-918.44 1267.82,-894.82 S1.1
NetR32_2: R32.2 S2.1 | length 95.4
  Top Layer w15: R32.2 833.77,-846.23 S2.1@850.77,-829.23
NetR33_2: R33.2 S3.1 | length 76.9
  Top Layer w19.68: R33.2 1670.38,-873.26 1690.32,-853.33 S3.1
NetR49_2: R49.2 U1.8 | length 225.7
  Top Layer w6: U1.8 1300.04,-1732.09 1316,-1748.05 v1(1316,-1780) ; v1(1394,-1859) R49.2@1420,-1885
  Bottom Layer w6: v1(1316,-1780) 1394,-1858 v1(1394,-1859)
NetU1_2: U1.2
NetU1_3: U1.3
NetU1_7: U1.7
PA9: MCU1.42
PA10: MCU1.43
PA13/SWDIO: DEBUG.3 MCU1.46 | length 1690.8
  Top Layer w10: v1(670,-1938) 694,-1938 v1(736,-1896) ; v1(1605,-1330) 1622.64,-1312.36 v1(1622.64,-1057.36)
  Bottom Layer w10: DEBUG.3@670,-1992.6 v1(670,-1938) ; v1(736,-1896) 736,-1689 1007,-1418 1517,-1418 v1(1605,-1330)
  Bottom Layer w12: v1(1622.64,-1057.36) MCU1.46
PA14/SWCLK: DEBUG.1 MCU1.49 | length 1568
  Top Layer w10: v1(1577,-1322) 1599.95,-1299.05 v1(1599.95,-1122.05)
  Bottom Layer w10: DEBUG.1@768,-1958 714,-1904 714,-1679.89 997.89,-1396 1505.11,-1396 1577,-1324.11 v1(1577,-1322) ; MCU1.49 v1(1599.95,-1122.05)
PB3: DEBUG.2 MCU1.55 | length 1616
  Top Layer w10: v1(1481.84,-1116.16) 1545,-1179.32 v1(1545,-1325)
  Bottom Layer w10: DEBUG.2 718.8,-1937.8 692,-1911 692,-1670.77 988.77,-1374 1496,-1374 v1(1545,-1325) ; MCU1.55 v1(1481.84,-1116.16)
REGN: C14.1 R5.1 U1.22 | length 658.2
  Top Layer w6: C14.1 1053.01,-1744.57 1085.16,-1712.41 U1.22 ; R5.1@1420.78,-1544.57 1428.31,-1537.03 v1(1438.85,-1547.57)
  Bottom Layer w6: v1@1047.85,-1764.03 v1(1047.31,-1764.57) 1047.31,-1642.92 1082.66,-1607.57 1169.31,-1607.57 1229.31,-1547.57 v1(1438.85,-1547.57)
RESV1: J6.9 MCU1.38 | length 1424.5
  Bottom Layer w10: MCU1.38 2484.72,-899.88 2836,-1251.16 J6.9
RESV2: J6.10 MCU1.39 | length 1379.4
  Bottom Layer w10: MCU1.39 2476.56,-919.56 2786,-1229 J6.10
SCK: J6.4 MCU1.34 | length 1675
  Bottom Layer w10: MCU1.34 2517.33,-821.14 2894.19,-1198 2978,-1198 3086,-1306 J6.4
SCL1: MCU1.2 R47.1 U1.5 | length 1434
  Top Layer w10: U1.5 1223.84,-1809.92 1251.6,-1837.69 1440.15,-1837.69 1510,-1767.84 1510,-1235.16 v1@1338.92,-1064.08
  Bottom Layer w10: R47.1 1183.98,-1179.35 1183.98,-1085.95 1192.89,-1077.04 MCU1.2 1289.88,-1077.04 1301.07,-1088.23 1318.47,-1088.23 v1@1344,-1062.7
  other v1: 1344,-1059
SDA1: MCU1.3 R26.1 U1.6 | length 1306.5
  Top Layer w10: U1.6 1276.29,-1818 1432,-1818 1494,-1756 1494,-1247 1314.23,-1067.23 v1(1309.77,-1067.23)
  Bottom Layer w10: R26.1 1159.67,-1118.01 1167.27,-1110.41 1167.27,-1074.37 1184.29,-1057.36 MCU1.3 1299.89,-1057.36 v1(1309.77,-1067.23)
VBAT: +.1 C15.1 S1.2 S2.2 S3.2 U1.13 U1.14 | length 2240
  Top Layer w10: 716.03,-708.55 716.03,-1210.03 v1(730,-1224) ; 949.19,-582.24 1001.44,-530 1077,-530 1167.11,-620.11 ; U1.14 1223.84,-1598.04 ; S1.2 1326.84,-508.5 1664.86,-508.5 S3.2
  Top Layer w12: 1223.84,-1598.04 C15.1 C15.1@1267.31,-1548.97 ; U1.13 1243.52,-1592.88 C15.1@1267.31,-1569.09
  Top Layer w20: +.1 1308.98,-1378.98 1308.98,-1512.89 C15.1
  Bottom Layer w10: v1(730,-1224) 834,-1328 +.1@1261,-1328
VBOOST: C6.1 C13.1 R1.2 U1.23 | length 4175.7
  Top Layer w10: C13.1 C6.1 1043.33,-1804.57 1078.78,-1769.12 1078.78,-1743.1 1089.78,-1732.1 U1.23
  Top Layer w20: v1(2646,-1280) 2646,-719 2852,-513 3370,-513 v1(3441,-584)
  Bottom Layer w20: v1(936.31,-1793.03) 894,-1835.34 894,-1991 947,-2044 1604,-2044 1694,-2134 1932,-2134 2182,-1884 2182,-1792 2646,-1328 v1(2646,-1280) ; R1.2 3441,-633.6 v1(3441,-584)
VBUS: C1.1 C31.1 U1.1 U1.24 USB1.1 | length 456.8
  Top Layer w10: C1.1@1102.31,-1831.1 C1.1@1111.64,-1821.78 ; C1.1@1111.64,-1821.78 1145.1,-1788.31 U1.1 U1.24 C1.1@1111.64,-1821.78
  Top Layer w18: C31.1 1183.3,-1990.9 1211.02,-2018.62 USB1.1
  Top Layer w20: C1.1 1180.78,-1914.57 C31.1
VCC_3V3: C7.2 C8.2 C9.2 C11.2 C38.1 C40.1 D1.1 D2.1 D3.1 D5.1 D6.1 MCU1.1 MCU1.19 MCU1.32 MCU1.48 MCU1.64 R18.2 R21.2 R26.2 R47.2 R48.2 U7.5 | length 6447.9
  Top Layer w10: v1(1653,-1293) 1678,-1268 v1(1678,-1141)
  Top Layer w15: D2.1@989.28,-371.65 D3.1 ; D3.1@1553.06,-381.3 D1.1 v1(1736.3,-381.3)
  Top Layer w20: v1(1678,-1141) 1678,-1087 1902,-863 v1(1902,-724.09)
  Bottom Layer w10: C40.1 C40.1@841.98,-1192.08 ; C9.2 1249.09,-1169.09 1299,-1219 1299,-1255 1336,-1292 1653,-1292 v1(1653,-1293) ; C9.2@1248.81,-1167.59 MCU1.64 ; MCU1.19 1344.05,-825.74 1397,-878.7 1487.7,-878.7 1594,-985 1594,-1069 1621.73,-1096.73 MCU1.48 1651.13,-1116.41 C11.2 1677.21,-1141 v1(1678,-1141) ; v1(1824,-957) 1845,-978 R48.2
  Bottom Layer w15: U7.5 682.81,-1177.95 C40.1 912,-1093.8 912,-865.86 R21.2 ; C40.1@841.98,-1192.08 854.56,-1204.66 R47.2 ; R26.2 1118.98,-1167.66 R47.2 ; MCU1.1 1233.81,-1155.59 ; C9.2 1233.81,-1155.59 ; C8.2 1344.05,-679.25 MCU1.19 ; 1606.45,-724.09 C7.2 ; 1736,-724.09 1797,-663.09 1797,-442 v1(1736.3,-381.3) ; R47.2 1118.98,-1213.98 1147.66,-1242.66 1168.34,-1242.66 1233.81,-1177.19 1233.81,-1155.59
  Bottom Layer w20: C7.2 1736,-724.09 v1(1902,-724.09) 2157.91,-724.09 2383.34,-498.66 3454.66,-498.66 3493.77,-537.77 R18.2
VDD_3V3A: C12.2 C45.1 C46.1 MCU1.13 R21.1 Stick1.1 Stick1.4 Stick2.1 Stick2.4 | length 5585.6
  Top Layer w15: v1(683,-409) 683,-412 976.7,-412 1009.7,-445 1067.25,-445 1089.75,-422.5 1832.5,-422.5 2194,-784.01 Stick2.1
  Bottom Layer w10: C46.1 1138.34,-848.85 C12.2 1177.86,-860.51 MCU1.13
  Bottom Layer w15: Stick1.4 -811.9,-241.55 -689.02,-118.66 -445.8,-118.66 Stick1.1 424.92,-234.84 600.54,-410.46 ; v1(683,-409) 602,-409 600.54,-410.46 ; C46.1@1103.22,-813.73 R21.1 600.54,-410.46 ; Stick2.4 2010.87,-1551.77 2194,-1368.64 Stick2.1
VIB1: MCU1.61 Q5.1 R40.2 R44.2 | length 2369.5
  Top Layer w15: v1(2453,-1133) 2453,-1333 2523,-1403 2984,-1403 3084.05,-1302.95 Q5.1 3040.08,-1250.39 R44.2 3027.28,-1278.36 3011.98,-1293.66 2967.98,-1293.66 2948.54,-1274.22 R40.2
  Bottom Layer w6: MCU1.61 1363.73,-1242.7 1393.03,-1272
  Bottom Layer w10: 1393.03,-1272 1812,-1272 1951,-1133 v1(2453,-1133)
VIB2: MCU1.62 Q6.1 R41.2 R45.2 | length 2216.7
  Top Layer w6: R41.2 -425.88,-1019.66 -108.02,-1019.66 -43.02,-954.66 312.66,-954.66 604,-1246 902,-1246 1050,-1098 1255,-1098 v1(1275,-1118)
  Top Layer w15: Q6.1 -531.18,-1108.11 R45.2 -515.43,-1058.66 R41.2
  Bottom Layer w6: v1(1275,-1118) 1328,-1118 1344.05,-1134.05 MCU1.62 MCU1.62@1346.3,-1167.59
VSYS: C2.1 C4.1 C28.1 C33.1 C34.1 C35.1 C36.1 D4.1 L1.1 Q1.2 Q2.2 R11.2 R14.2 R25.2 R36.1 R37.1 R49.1 U1.15 U1.16 U2.6 U7.1 U7.3 | length 9675.3
  Top Layer w10: U1.16 C2.1@1184.47,-1567.41 ; U1.15 C2.1@1204.15,-1561.4 ; R49.1 1565.46,-1960 v1(1626,-1960) ; v1(1593,-351) v1(1696,-248) ; v1(2373,-1175) v1(2373,-360)
  Top Layer w15: Q2.2 -424.28,-1369.69 R37.1 -314.33,-1298.19 C36.1 -140.39,-1127.56 C28.1 ; C28.1@-66.23,-1135.04 U2.6 16.04,-1135.04 155,-1274 206,-1274 232,-1300 812.63,-1300 L1.1 874.04,-1568.11 D4.1 ; C33.1 2928.24,-927.91 3037.13,-1036.81 Q1.2
  Top Layer w20: L1.1 L1.1@994.98,-1447.17
  Top Layer w30: L1.1@993.14,-1462.79 1027.59,-1428.35 1141.09,-1428.35 C4.1 C2.1 ; v1(2557,-1352) 2657,-1352 2798,-1211 2798,-1042.71 C33.1
  Bottom Layer w10: U7.1 597.21,-1202.79 616,-1184 616,-1153.14 590.85,-1127.99 U7.3 ; 1459,-1485 1516,-1485 1629,-1598 1995,-1598 2271,-1322 2271,-1277 v1(2373,-1175) ; v1(1593,-351) 1593,-375.68 R25.2 ; v1(1696,-248) 2261,-248 v1(2373,-360)
  Bottom Layer w15: C34.1 C35.1@479.11,-1205.39 ; C35.1@481.71,-1202.79 U7.1
  Bottom Layer w20: v1(293,-1294) 319.98,-1267.02 v1(319.98,-1205.66) 320.25,-1205.39 C34.1 ; v1(2913.98,-926.72) 2913.98,-775.66 3164.98,-524.66 3312.98,-524.66 3379.59,-591.27 R11.2
  Bottom Layer w30: v1(1198,-1495) 1208,-1485 1459,-1485 1625,-1651 1625,-1958 1760,-2093 1897,-2093 2087,-1903 2087,-1827 2557,-1357 v1(2557,-1352)
pads on no net: DEBUG.4 DEBUG.5 MCU1.7 MCU1.24 MCU1.25 MCU1.29 MCU1.40 MCU1.41 MCU1.50 MCU1.51 MCU1.52 MCU1.53 MCU1.54 MCU1.59 Stick1.0 Stick2.0 U7.4 USB1.4
copper on no net:
  other v2: 463.69,-1628.54 -354.22,-1526.18 2882.98,-1527.16 439.5,-421.41 2109.84,-412.36 3285.54,-22.24 -756.78,-21.26 82.78,183.47 2447.94,183.47
  other v4: 199.91,-1901.18 199.91,-1354.92 726.49,-1354.92 655.64,-747.4 1887.93,-655.27
  other v5: 300.3,-1797.83 -204.62,-1528.15 2733.38,-1528.15 632,-1458.27
  other v6: 342.52,-73.62 2179.13,-73.62

## Polygon pours and split planes (outlines as drawn)
GND on Bottom Layer "Top Layer-No Net" (solid, remove dead copper, pour order 4): -1305,589 -1230,514 4446,514 4446,-2291 3425,-3312 2927,-2814 -1212,-2814
GND on Top Layer "Top Layer-No Net" (solid, remove dead copper, pour order 12): 994.88,-2275.59 909.35,-2190.06 645.92,-2190.06 645.92,-1524.08 917,-1253 967,-1203 1491,-1203 1498,-1203 1663,-1368 1663,-2197 1564.14,-2295.86

## Keep-outs
Keep-Out Layer:
  lines w10: -874.02,-1408.27 -842.52,-1408.27 -842.52,-1447.64 -209.84,-1673.23 301.97,-2185.04 994.88,-2185.04 994.88,-2275.59 1534.25,-2275.59 1534.25,-2185.04 2227.17,-2185.04 2738.98,-1673.23 3507.88,-1397.64 3507.88,-1106.3 cw(c3677.01,-1005.58) 3586.62,-830.71 3586.62,-358.27 3397.64,141.73 3248.03,141.73 3248.03,53.94 2547.25,53.94 2547.25,283.46 2355.91,283.46 1904.33,-51.18 624.8,-51.18 173.23,283.46 0,283.46 0,0 -677.17,0 -677.17,98.82 -834.65,98.82 -834.65,-58.66 -874.02,-58.66 -874.02,-1408.27

## Silkscreen, mask and mechanical layers (free items; w line width, h text height)
Top Overlay:
  circle w10: c462.99,-1280.32 r157.48
  circle w10: c811.02,-1627.95 r157.48
  circle w10: c462.99,-1975.59 r157.48
  circle w10: c114.96,-1627.95 r157.48
  circle w5: c848.03,-677.95 r157.48
  circle w5: c1269.69,-715.75 r157.48
  circle w5: c1691.34,-677.95 r157.48
  lines w5: 1603.54,-1885.04 1755.51,-1885.04 1755.51,-2034.25 2469.29,-2034.25 2469.29,-1828.74 2669.69,-1828.74 2669.69,-1435.04 2431.1,-1435.04 2431.1,-1271.65 2312.6,-1271.65 2312.6,-1147.64 1879.53,-1147.64 1879.53,-1271.65 1759.84,-1271.65 1759.84,-1424.02 1603.54,-1424.02 ; 1604.44,-1883.46 1604.44,-1422.44 ; -866.54,-997.24 -48.43,-997.24 -48.43,-832.68 170.87,-832.68 170.87,-431.1 -63.39,-431.1 -63.39,-267.72 -182.28,-267.72 -182.28,-155.51 -767.32,-155.51 -767.32,-307.48 -866.54,-307.48 -866.54,-997.24
Bottom Overlay:
  lines w11.81: 2434,-215 2434,-1363 3299.32,-1364.76
Mechanical 7:
  circle w1.97: c-756.3,-21.65 r45.28
  circle w1.97: c82.28,183.07 r45.28
  lines w5: 292.04,-715.29 292.04,-708.39 297.43,-708.39 298.63,-709.61 298.63,-731.11 ; 301.03,-721.38 313.61,-716.51 ; 302.22,-729.09 306.42,-723.4 ; 302.82,-728.27 312.41,-727.06 ; 307.62,-724.62 305.82,-722.19 305.82,-711.64 306.42,-708.39 310.01,-712.04 ; 317.2,-709.61 319.6,-709.2 333.97,-713.26 ; 317.8,-725.03 329.78,-723.81 ; 322.59,-731.11 322.59,-712.45 325.59,-715.69 ; 326.78,-718.13 327.38,-721.78 ; 331.58,-723 333.37,-718.54 332.17,-716.51 333.97,-713.26 ; 332.17,-722.19 338.76,-721.38 ; 332.77,-726.24 335.77,-729.49 ; 338.16,-713.67 333.97,-713.26
Mechanical 8:
  drawing of 994 lines, arcs and shapes, not listed

## Text inside footprints (layer, text, board x,y; h text height)
C31: Mechanical 10 "1" at 1173.3,-1914.57 h25; Mechanical 10 "2" at 1310.7,-1914.57 h25
DEBUG: Mechanical 5 "8" at 443.4,-2101.3 h25; Mechanical 5 "7" at 866.6,-2101.3 h25; Mechanical 5 "6" at 531.9,-1993 h25; Mechanical 5 "5" at 581.2,-1993 h25; Mechanical 5 "4" at 630.4,-1993 h25; Mechanical 5 "3" at 679.6,-1993 h25; Mechanical 5 "2" at 728.8,-1993 h25; Mechanical 5 "1" at 778,-1993 h25
R10: Mechanical 1 "R1" at 1132.94,-668.1 h11.81 r90
R12: Mechanical 1 "R1" at 1429.96,-546.21 h11.81
U2: Mechanical 15 "1" at 82.79,-1153.57 h29.53 r270